# Altium PCB hh.PcbDoc
Units mm, origin at the board's own origin, x right, y up, seen from the top; angles counter-clockwise.
Board outline 82 x 82 mm, 4 copper layers (Top Layer, Internal Plane 1, Internal Plane 2, Bottom Layer); 28 components, 19 nets, 63 pads, 0 vias.
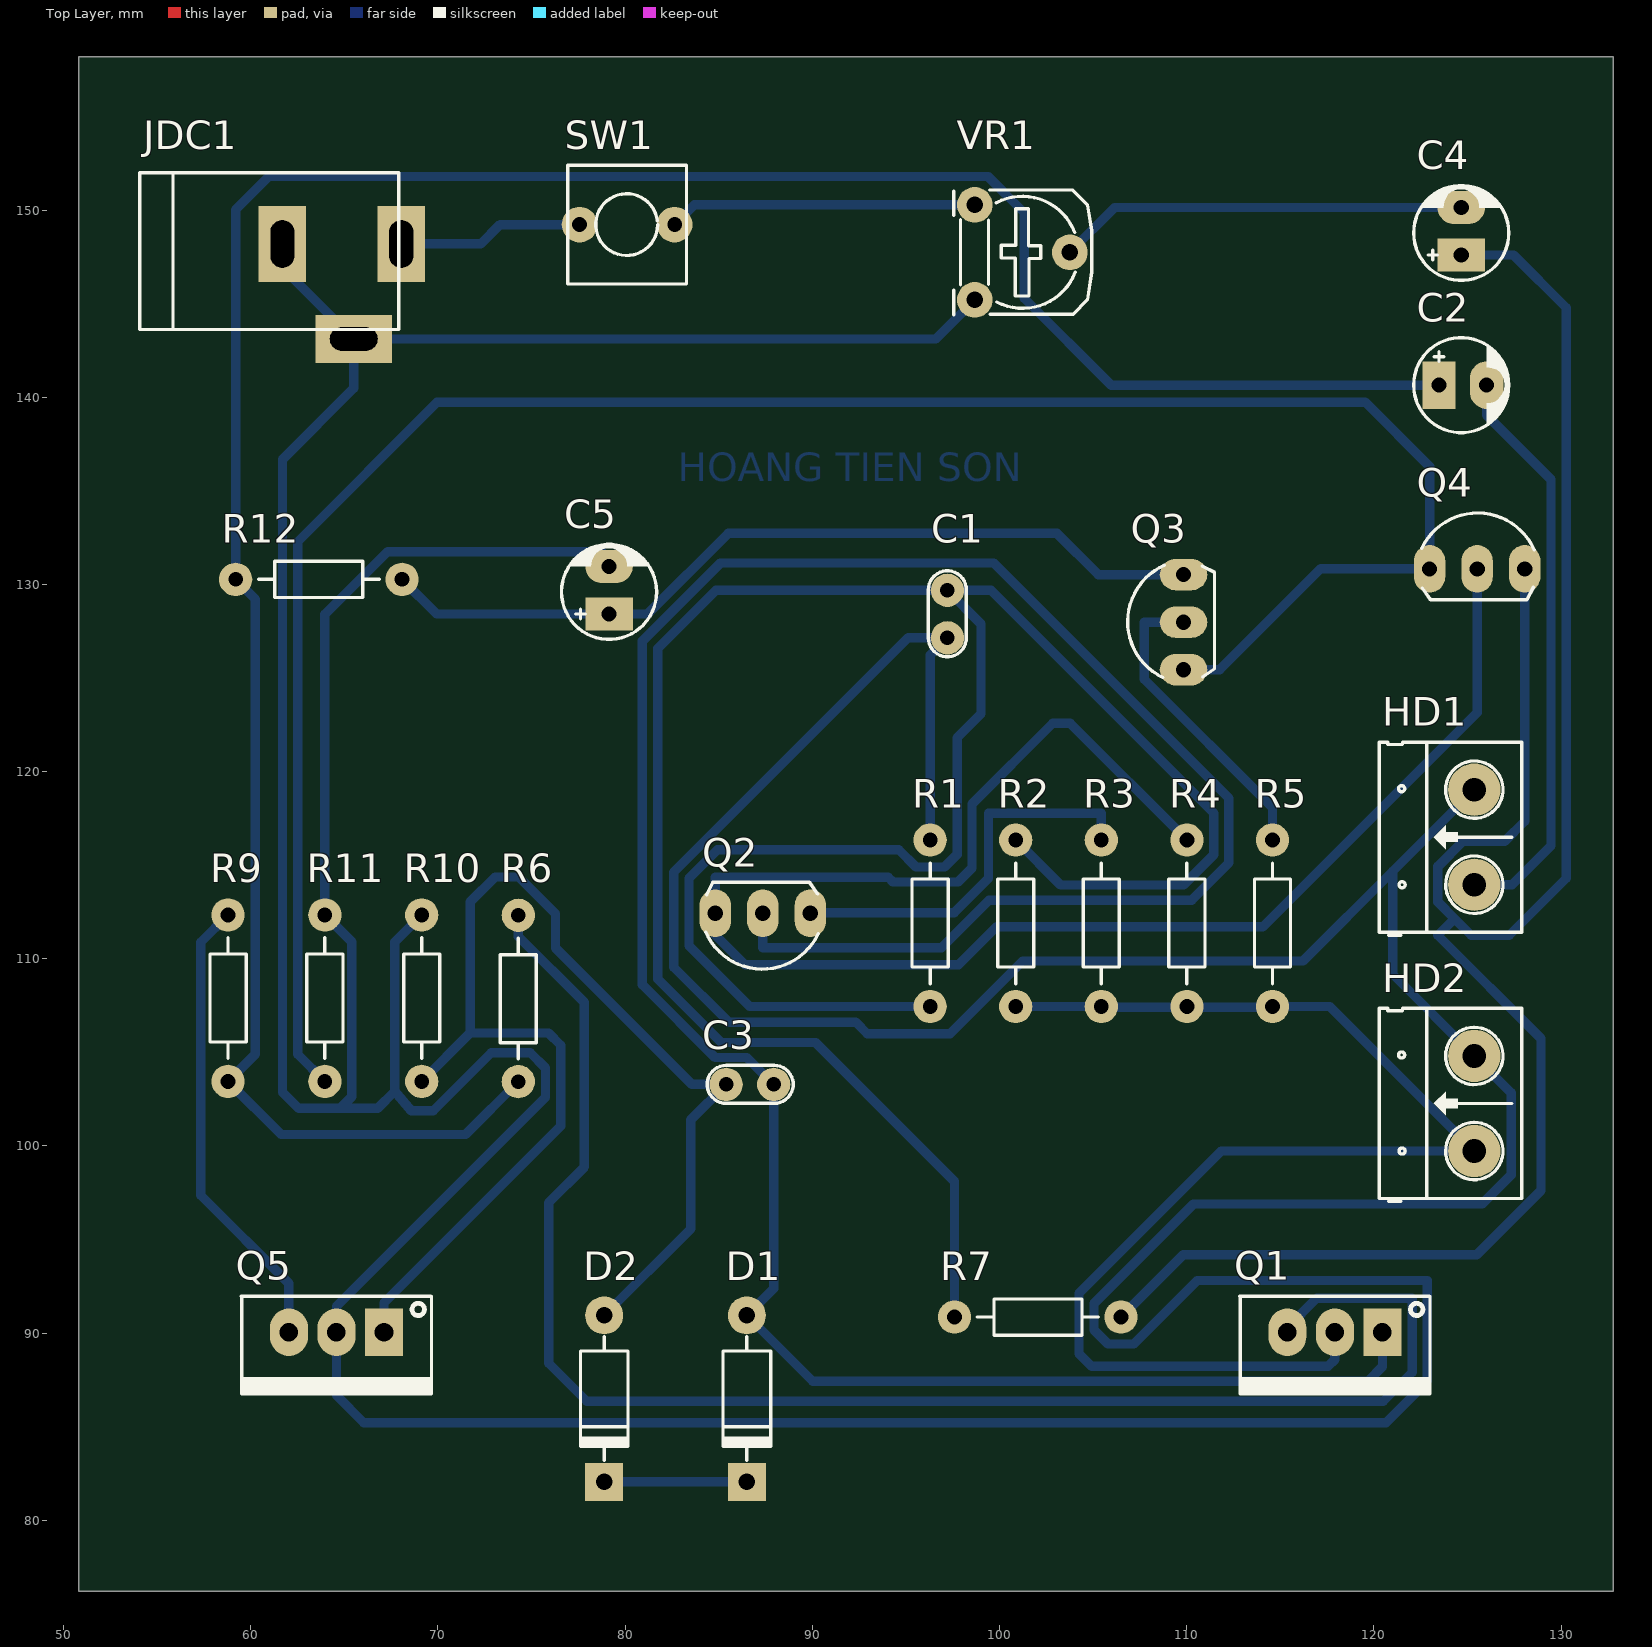
[diagram p0: Top Layer view]
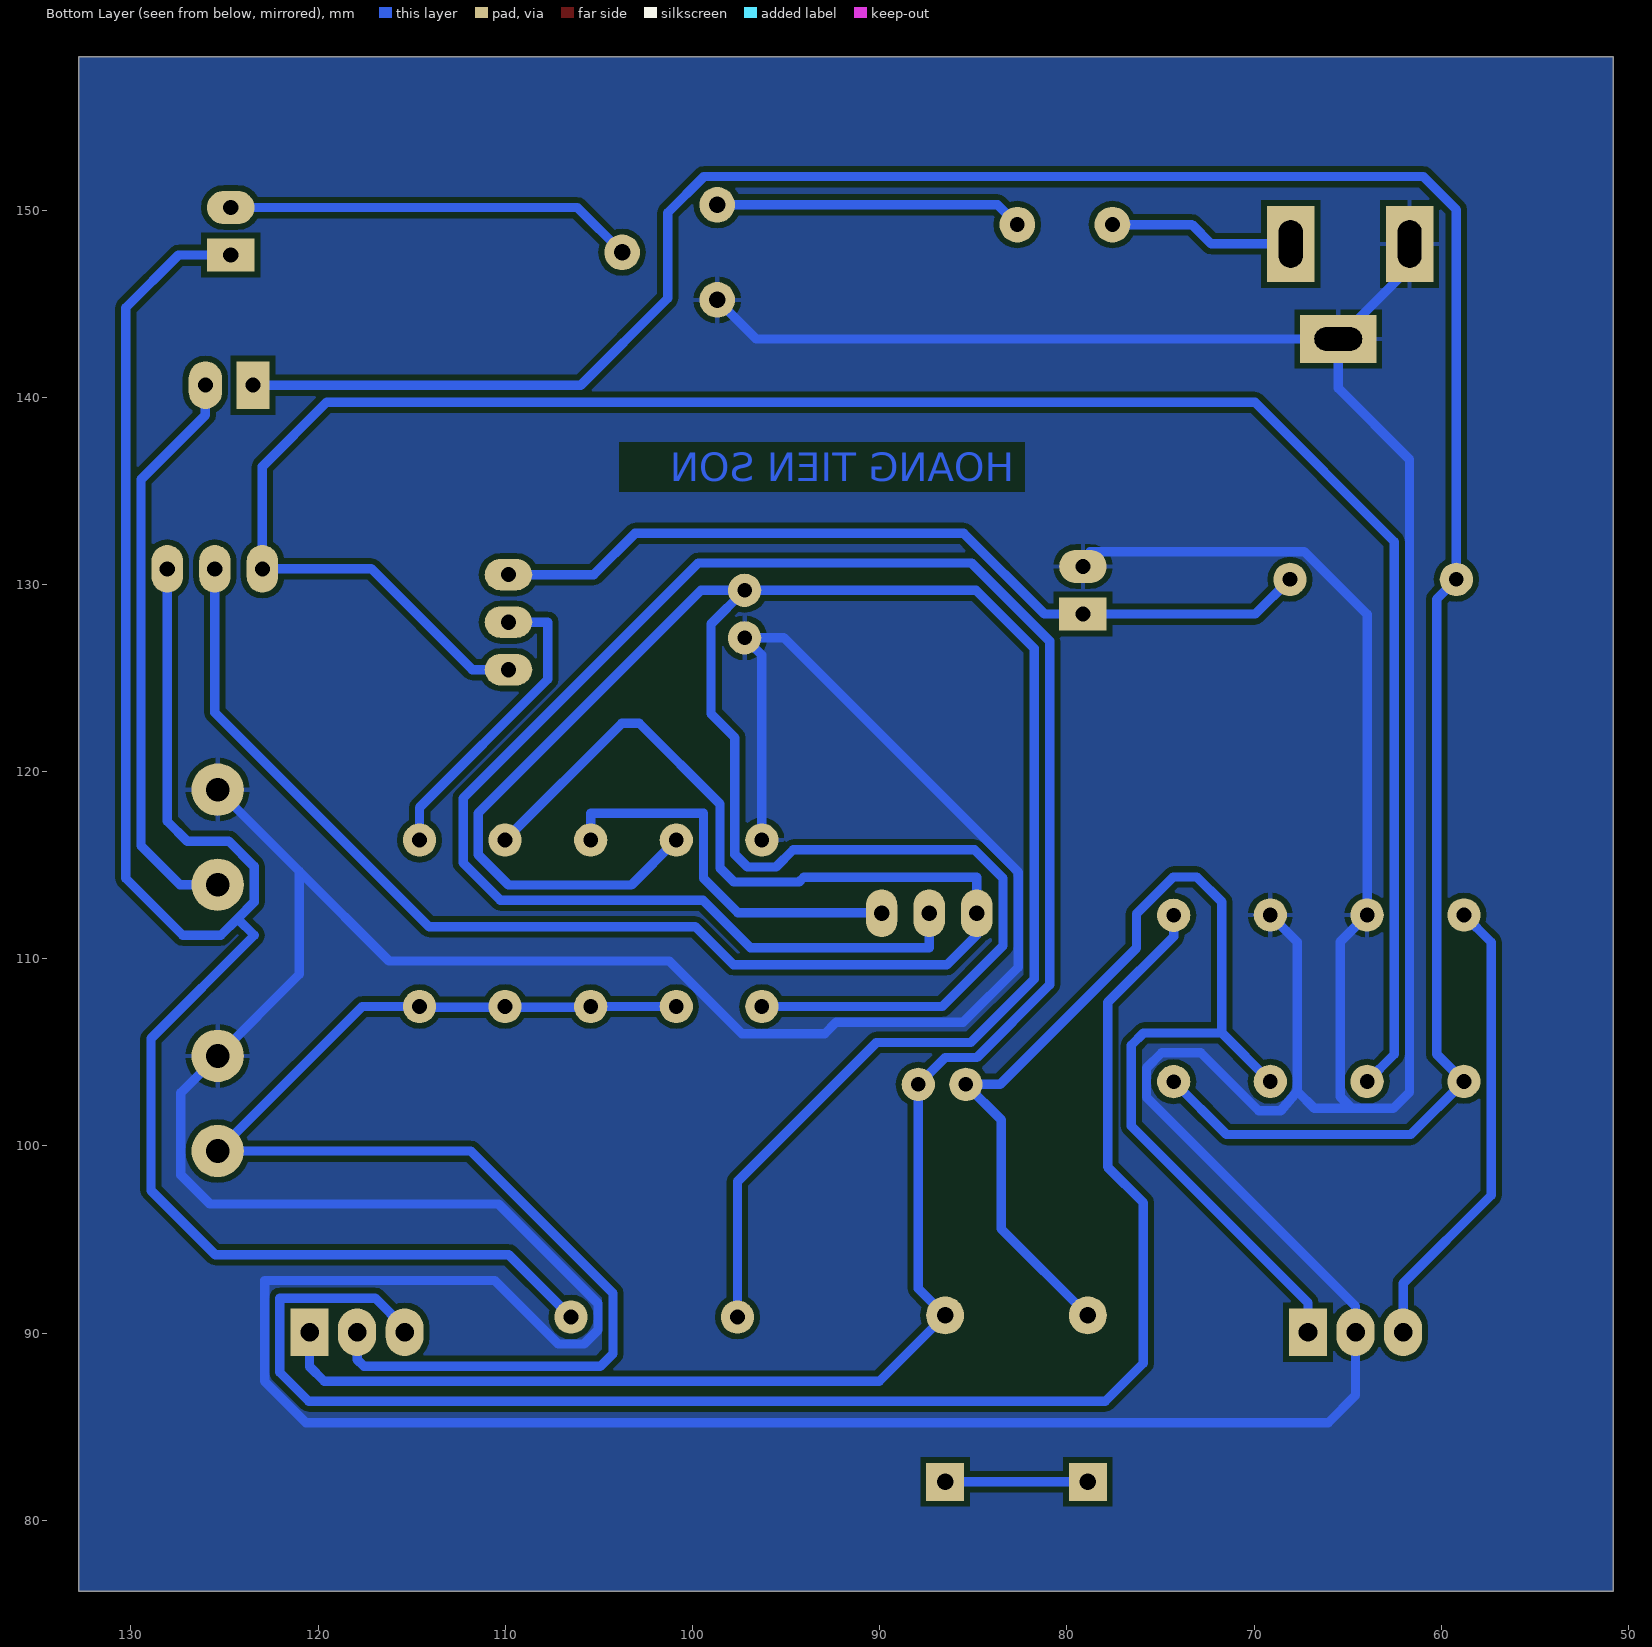
[diagram p1: Bottom Layer view, seen from below]
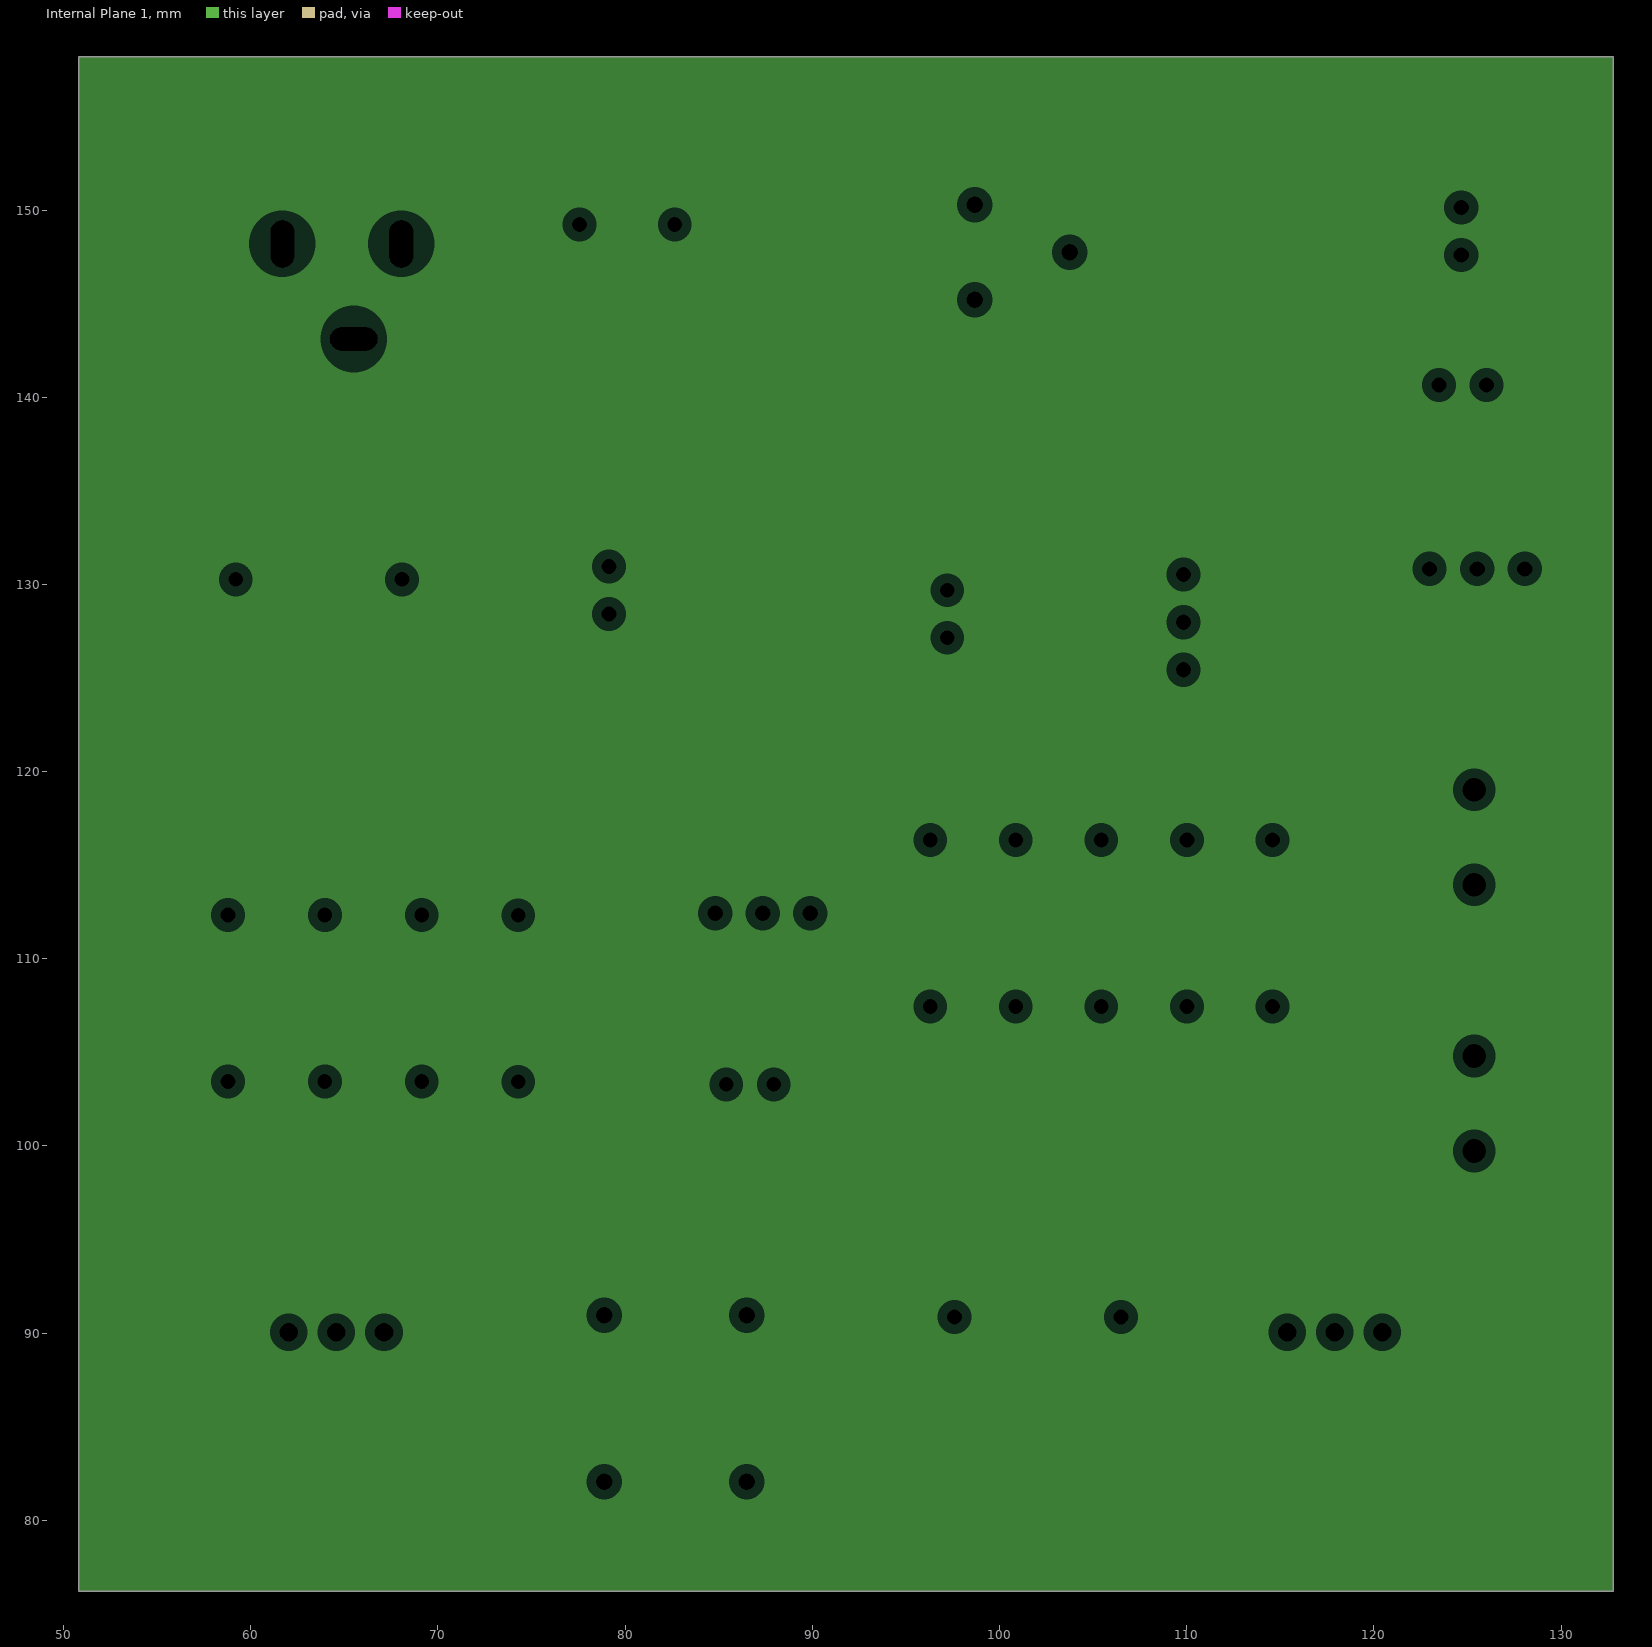
[diagram p2: Internal Plane 1, clearances drawn from the general rule]
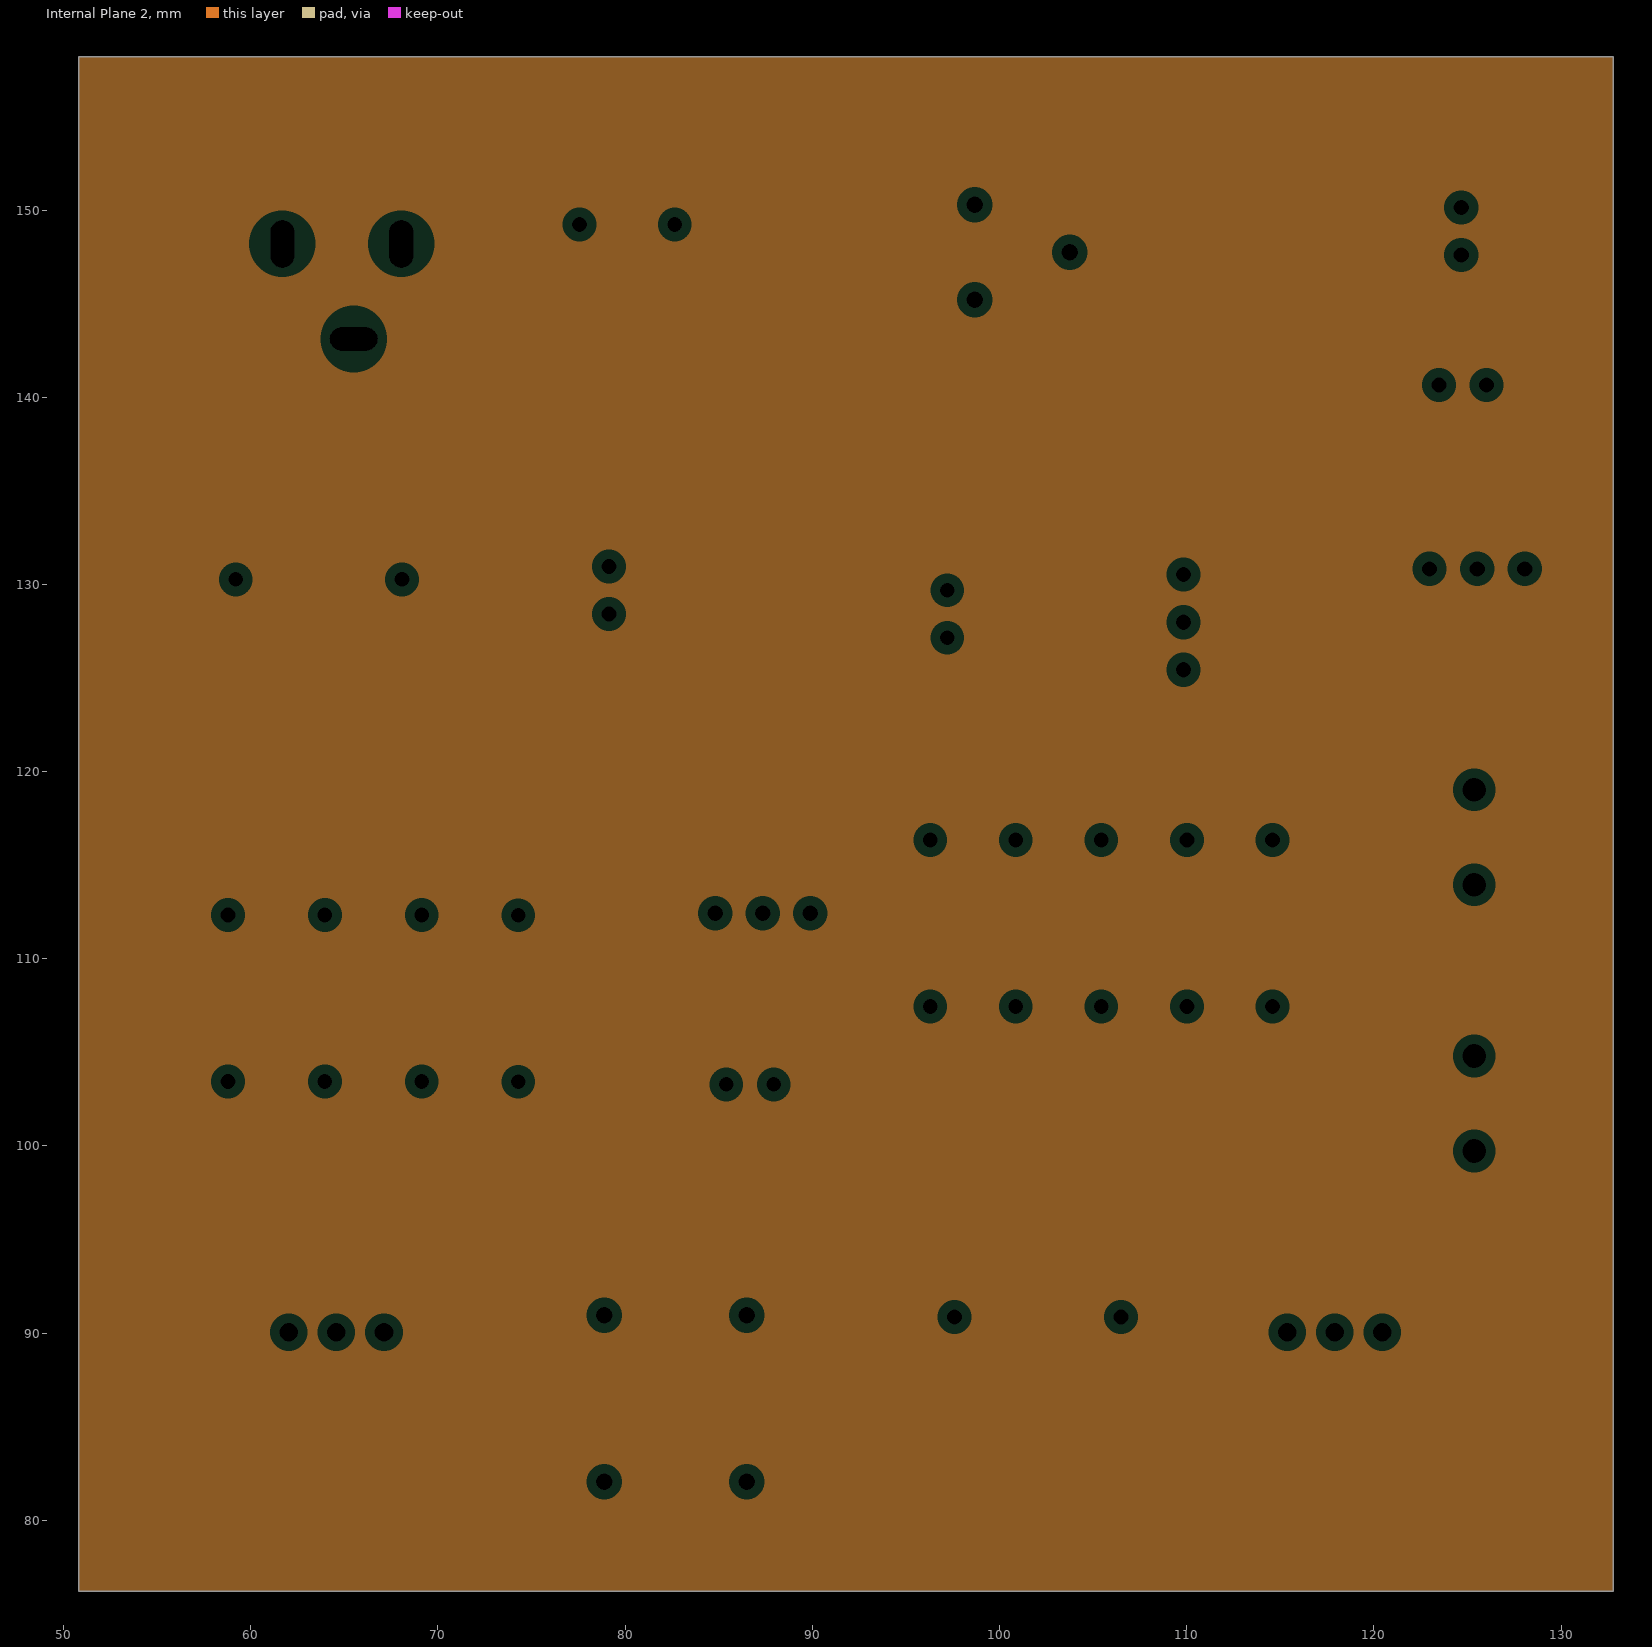
[diagram p3: Internal Plane 2, clearances drawn from the general rule]
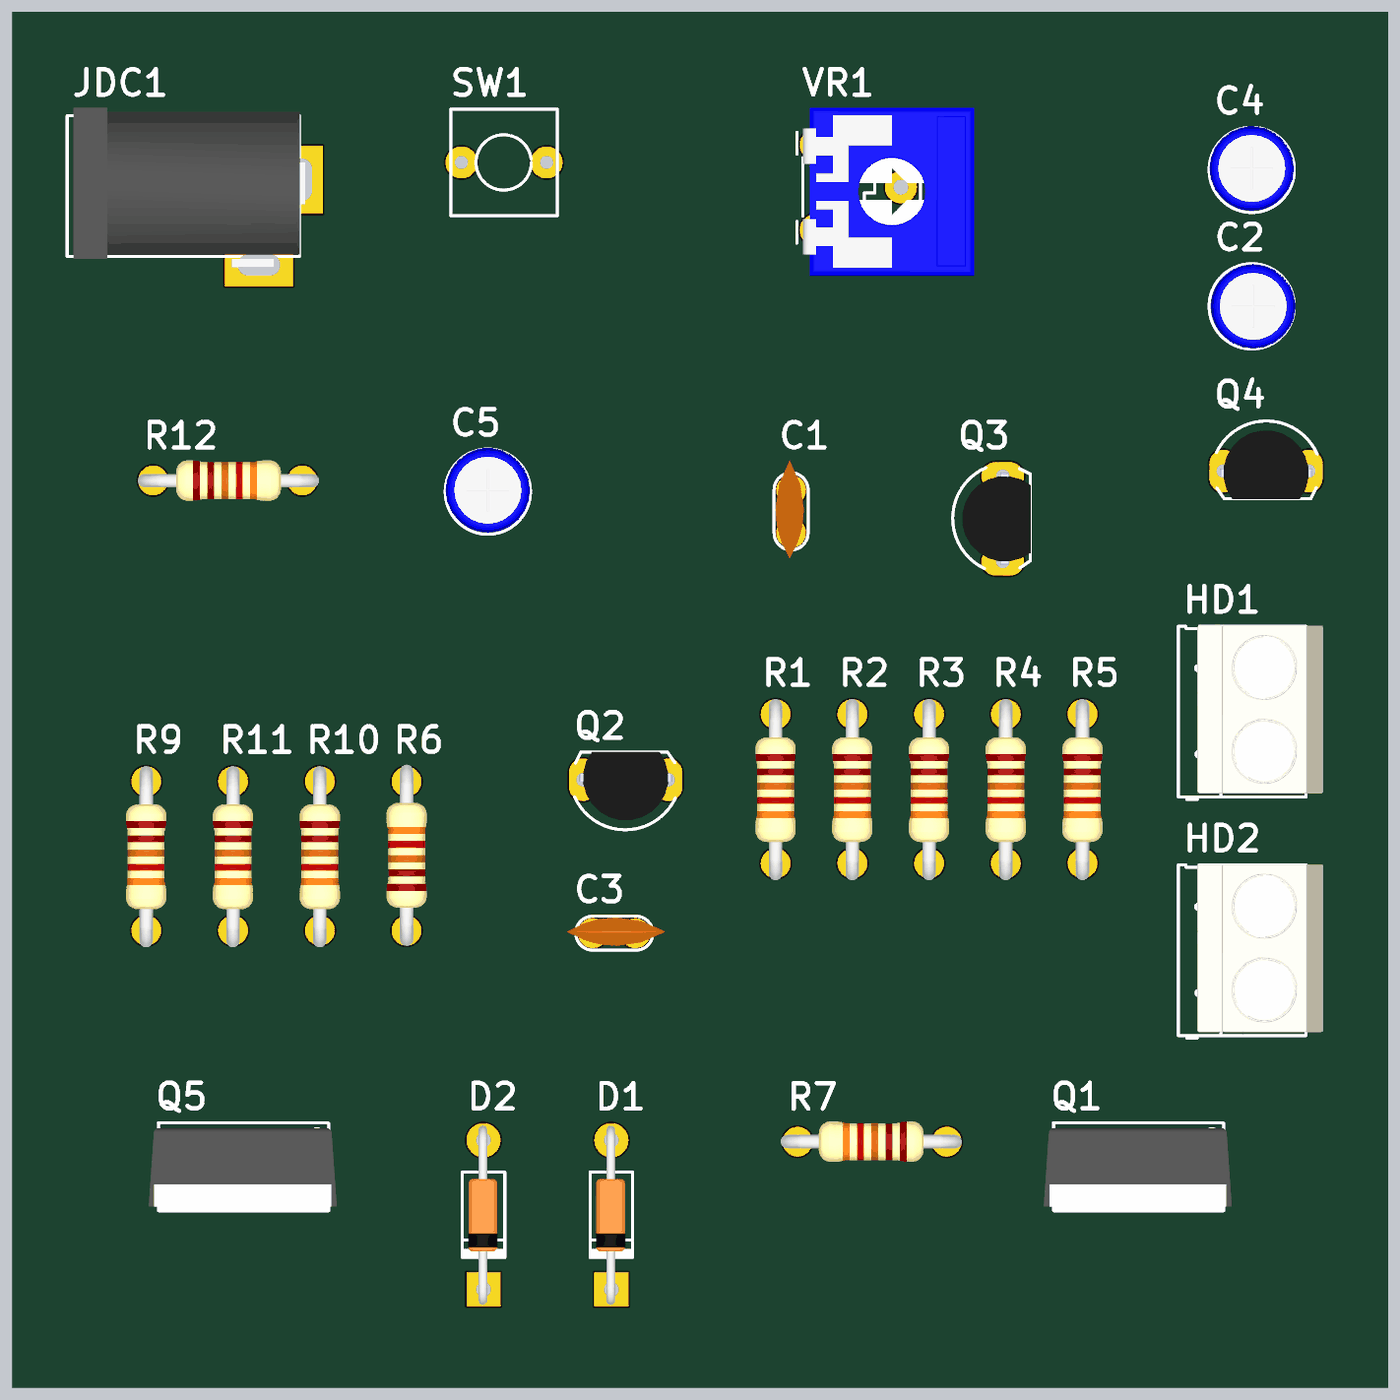
[diagram p4: 3D render of the assembled board from above, using the file's embedded part models]

## Layer stack, top to bottom
Top Layer: signal copper 0.0356
Dielectric: dielectric 0.32, FR-4, Dk 4.8
Internal Plane 1: plane copper 0.0356
Dielectric: dielectric 0.32, FR-4, Dk 4.8
Internal Plane 2: plane copper 0.0356
Dielectric: dielectric 0.32, FR-4, Dk 4.8
Bottom Layer: signal copper 0.0356

## Board outline
50.8,76.2 132.8,76.2 132.8,158.2 50.8,158.2

## Design rules (kind name [scope] priority, off if disabled: settings)
Clearance [All] p1: gap=0.3
PlaneClearance [All] p1: clearance=0.508
PlaneConnect [All] p1: planeconnectstyle=Relief reliefexpansion=0.508 reliefentries=4 reliefconductorwidth=0.254 reliefairgap=0.254
PolygonConnect [All] p1: connectstyle=Relief reliefconductorwidth=0.254 reliefentries=4 polygonreliefangle="90 Angle"
RoomDefinition nguyenly [InComponentClass('nguyenly')] p1: confinementstyle=ConfineIn formatcopy=TRUE lockcomponents=FALSE outline 0,0 50.8,0 50.8,25.4 0,25.4
RoutingLayers [All] p1: top layer_v5=FALSE bottom layer_v5=TRUE
RoutingVias [All] p1: holewidth=0.6 width=1 viastyle="Through Hole" minholewidth=0.711 minwidth=1.27 maxholewidth=0.711 maxwidth=1.27
SilkscreenOverComponentPads [All] p1: minsilkscreentomaskgap=0.254
SolderMaskExpansion [All] p1: expansion=0.102
Width GND [All] p1: maxlimit=0.5 minlimit=0.5 preferedwidth=0.5
Width NET [All] p2: maxlimit=0.5 minlimit=0.5 preferedwidth=0.5
24 further rules are at their usual default settings.

## Components (designator, comment, footprint, x,y, rotation, side; value= is the part's Value field where it differs from the comment)
C1 "100pF" CN1 97.215,127.146 r90 top
C2 "10uF" CP1/2 123.484,140.646 r0 top
C3 "100pF" CN1 85.398,103.29 r0 top
C4 "10uF" CP1/2 124.667,147.594 r90 top
C5 "10uF" CP1/2 79.142,128.418 r90 top
D1 "1N4007" D1A 86.503,90.95 r90 top
D2 "1N4007" D1A 78.883,90.95 r90 top
HD1 "Header 2" HED2 125.367,113.954 r90 top
HD2 "Header 2" HED2 125.367,99.73 r90 top
JDC1 "Jac DC" DC-IN 64.867,145.65 r0 top
Q1 "TIP41C" QTO-220 120.459,90.048 r180 top
Q2 "A1015" QTO-92 87.355,112.434 r180 top
Q3 "C1815" QTO-92 109.831,127.982 r90 top
Q4 "C1815" QTO-92 125.518,130.83 r0 top
Q5 "TIP42C" QTO-220 67.119,90.048 r180 top
R1 "Res1" R1/4W 96.295,107.45 r90 top
R2 "Res1" R1/4W 100.867,107.45 r90 top
R3 "Res1" R1/4W 105.439,107.45 r90 top
R4 "Res1" R1/4W 110.012,107.45 r90 top
R5 "Res1" R1/4W 114.584,107.45 r90 top
R6 "Res1" R1/4W 74.295,112.325 r270 top
R7 "Res1" R1/4W 97.599,90.861 r0 top
R9 "Res1" R1/4W 58.787,103.45 r90 top
R10 "Res1" R1/4W 69.134,103.45 r90 top
R11 "Res1" R1/4W 63.96,103.45 r90 top
R12 "Res1" R1/4W 68.083,130.268 r180 top
SW1 "SW" SW2 77.567,149.222 r0 top
VR1 "10K" VR 98.679,150.28 r270 top

## Footprints (in the part's own frame and the unit in brackets; to place one, negate y for a bottom-side part, rotate by r counter-clockwise, add the part's x,y. Pads: shape width x height; smd on the part's side, far side on the other; paste and mask are expansions set on the pad)
CN1 [mil]
  round 70 hole 31: 1(0,0) 2(100,0)
  silkscreen extent -40,-40 141,40, body extent -60,-30 170,37, height 265
CP1/2 [mil] "Tu hoa < 22uF/16>50V"
  rect 70x100 hole 32: 1(0,0)
  oval 70x100 hole 32: 2(100,0)
  silkscreen extent -53,-100 147,100, body extent -49,-99 149,99, height 287
D1A [mil] "Diode 1A, W 100mil, L 350mil"
  round 80 hole 35: 1(0,0)
  rect 80x80 hole 35: 2(-350,0)
  silkscreen extent -305,-50 -45,50, body extent -386,-33 34,36, height 84
DC-IN [mil] "Jac DC input"
  rect 100x160 hole 50 slot 100 at 90 deg: 1(125,100) 2(-125,100)
  rect 160x100 hole 50 slot 100 at 0 deg: 3(25,-100)
  silkscreen extent -425,-80 120,250, body extent -410,-105 134,269, height 434
HED2 [mil] "Header 2, 2 pin, hight 300mil, Pin to Pin 200, Colour Green"
  round 110 hole 50: 1(0,0) 2(200,0)
  silkscreen extent -106,-100 300,200, body extent -92,-140 302,155, height 394
QTO-92 [mil] "TO-92"
  oval 66x100 hole 32: 1(-100,0) 2(0,0) 3(100,0)
  silkscreen extent -117,-65 120,118, body extent -109,-66 109,95, height 245
QTO-220 [mil] "TO-220 - 1-2-3"
  rect 80x100 hole 39: 1(0,0)
  oval 80x100 hole 39: 2(100,0) 3(200,0)
  silkscreen extent -100,-76 300,130, body extent -119,-64 322,121, height 755
R1/4W [mil] "R 1/4W, 2 Pin, 350mil"
  round 70 hole 31: 1(0,0) 2(350,0)
  silkscreen extent 48,-38 302,38, body extent -40,-47 386,47, height 111
SW2 [mil] "SW button 2pin, 250x 250 mil"
  round 75 hole 31: 1(0,0) 2(200,0)
  silkscreen extent -25,-125 225,125
VR [mil] "Resistor Variable"
  round 75 hole 35: 1(0,0) 2(100,200) 3(200,0)
  silkscreen extent -31,-44 231,246, body extent -87,-30 307,372, height 165

## Part data
C1 C3: library part CN1, "Cap np  1pF - 472pF"
C2 C4 C5: library part CP1, "Cap P  0,1uF < 22uF , 16 - 50V"
D1 D2: library part D1A, "Diode 1A"
HD1 HD2: library part Hed2, "Header 2 (Green)"
JDC1: library part DCIN, "Jac DC input"
Q1: "NPN 2W, BCE"
Q2: "PNP 600mW, ECB"
Q3 Q4: "NPN 600mW, ECB"
Q5: "PNP 2W, BCE"
R1 R2 R3 R4 R5 R6 R7 R9 R10 R11 R12: library part Res1_1, "Resistor"
SW1: library part SW2, "Switch button 2 pin"
VR1: library part VR1, "Var Resistor"

## Nets (pads, with @x,y where several pads share a name; then routed paths per layer and width w, separated by ;. In a path a pad name is that pad's centre, name@x,y a point inside that pad or via, vN(x,y) a via of type N, cw(c..) or ccw(c..) an arc to the next point about the centre after c; other vN are vias at no path point)
GND: C1.1 C5.2 HD1.2 HD2.2 JDC1.2 JDC1.3 Q5.2 R1.2 R10.2 R11.2 VR1.3 | length 394.2
  Bottom Layer w0.5: JDC1.2 61.692,146.92 JDC1.3 ; R10.2 67.691,110.897 67.691,102.921 ; C5.2 78.765,130.958 78.765,131.75 67.31,131.75 63.96,128.4 R11.2 65.405,110.895 65.405,102.641 64.77,102.006 ; R1.2 96.295,126.226 C1.1 95.116,127.146 82.601,114.63 82.601,109.55 85.547,106.604 92.329,106.604 92.939,105.994 97.358,105.994 101.244,109.88 116.213,109.88 121.006,114.673 ; VR1.3 96.589,143.11 JDC1.3@65.507,143.11 ; HD1.2 121.006,114.673 ; 62.56,102.006 64.77,102.006 ; 62.56,102.006 61.697,102.87 61.697,136.677 65.507,140.487 JDC1.3@65.507,143.11 ; 62.56,102.006 64.77,102.006 ; 64.77,102.006 66.777,102.006 67.691,102.921 ; JDC1.3 JDC1.3@65.507,143.11 ; JDC1.3 JDC1.3@65.507,143.11 ; 67.691,102.921 68.58,101.879 69.748,101.879 72.847,104.978 74.93,104.978 75.743,104.165 75.743,102.604 64.579,91.44 Q5.2 64.579,86.678 66.04,85.217 120.65,85.217 122.86,87.427 122.86,92.812 110.566,92.812 107.177,89.422 105.798,89.422 105.05,90.17 105.05,91.588 110.363,96.901 125.781,96.901 127.33,98.45 127.33,102.847 HD2.2 121.006,109.171 121.006,114.673
NetC1_2: C1.2 R1.1 R2.2 R7.1 | length 144.5
  Bottom Layer w0.5: R1.1 86.657,107.45 83.414,110.693 83.414,114.3 84.938,115.824 94.615,115.824 95.538,114.901 97.065,114.901 97.734,115.57 97.734,121.813 99.009,123.088 99.009,127.892 C1.2 ; R7.1 97.599,98.107 90.177,105.529 85.138,105.529 81.746,108.92 81.746,126.577 84.855,129.686 C1.2 ; R2.2 103.263,113.944 109.829,113.944 111.455,115.57 111.455,117.78 99.549,129.686 C1.2
NetC2_1: C2.1 R6.2 R9.1 R12.2 | length 137.8
  Bottom Layer w0.5: R6.2 71.471,100.611 61.626,100.611 R9.1 60.249,104.912 60.249,129.212 R12.2 59.193,150.023 60.96,151.79 99.39,151.79 101.321,149.86 101.321,145.288 105.963,140.646 C2.1
NetC2_2: C2.2 HD1.1 | length 31
  Bottom Layer w0.5: HD1.1 127.381,113.954 129.464,116.037 129.464,135.611 126.024,139.051 C2.2
NetC3_1: C3.1 D2.1 Q5.1 R10.1 | length 69.9
  Bottom Layer w0.5: Q5.1 67.119,91.63 76.556,101.066 76.556,105.385 75.905,106.035 71.719,106.035 ; R10.1 71.719,106.035 ; D2.1 83.515,95.582 83.515,101.408 C3.1 83.571,103.29 76.284,110.577 76.284,112.403 74.316,114.372 73.061,114.372 71.719,113.03 71.719,106.035
NetC3_2: C3.2 D1.1 Q1.1 Q2.2 | length 148.4
  Bottom Layer w0.5: Q2.2 87.355,110.592 96.901,110.592 99.441,113.132 110.261,113.132 112.255,115.125 112.255,118.58 99.695,131.14 85.09,131.14 80.924,126.975 80.924,108.611 84.806,104.729 86.499,104.729 C3.2 87.938,92.385 D1.1 90.026,87.427 119.672,87.427 120.459,88.214 Q1.1
NetC4_1: C4.1 Q4.3 R7.2 | length 110.8
  Bottom Layer w0.5: R7.2 109.824,94.196 125.504,94.196 128.93,97.623 128.93,105.74 123.419,111.252 124.308,112.142 ; C4.1 127.457,147.594 130.277,144.775 130.277,114.3 127.229,111.252 125.198,111.252 124.308,112.142 ; Q4.3 128.058,117.345 127,116.287 124.772,116.287 123.42,114.935 123.42,113.03 ; 123.42,113.03 124.308,112.142 ; 123.42,113.03 124.308,112.142
NetC4_2: C4.2 VR1.2 | length 21.9
  Bottom Layer w0.5: VR1.2 106.153,150.134 C4.2
NetC5_1: C5.1 Q3.3 R12.1 | length 45.2
  Bottom Layer w0.5: R12.1 69.933,128.418 C5.1 81.197,128.418 85.504,132.725 103.069,132.725 105.271,130.522 Q3.3
NetD1_2: D1.2 D2.2 | length 7.6
  Bottom Layer w0.5: D2.2 D1.2
NetHD2_1: HD2.1 Q1.2 R2.1 R3.1 R4.1 R5.1 | length 70.8
  Bottom Layer w0.5: R2.1 R3.1 105.482,107.408 109.97,107.408 R4.1 110.054,107.408 114.542,107.408 R5.1 117.647,107.45 HD2.1 111.846,99.73 104.25,92.134 104.25,88.9 104.922,88.228 117.552,88.228 117.919,88.595 Q1.2
NetJDC1_1: JDC1.1 SW1.1 | length 10
  Bottom Layer w0.5: JDC1.1 72.288,148.19 73.32,149.222 SW1.1
NetQ1_3: Q1.3 R6.1 | length 85.3
  Bottom Layer w0.5: R6.1 74.295,111.193 77.825,107.662 77.825,98.882 75.917,96.974 75.917,88.396 77.952,86.361 120.498,86.361 122.047,87.909 122.047,91.868 116.942,91.868 115.379,90.306 Q1.3
NetQ2_1: Q2.1 R3.2 | length 21.3
  Bottom Layer w0.5: Q2.1 89.895,112.46 97.575,112.46 99.416,114.3 99.416,117.78 105.44,117.78 R3.2
NetQ2_3: Q2.3 Q4.2 R4.2 | length 91.1
  Bottom Layer w0.5: R4.2 103.772,122.58 102.848,122.58 98.534,118.266 98.534,114.845 97.79,114.101 94.306,114.101 94.056,114.351 84.815,114.351 Q2.3 84.815,111.273 86.411,109.677 97.813,109.677 99.845,111.709 114.071,111.709 125.518,123.156 Q4.2
NetQ3_1: Q3.1 Q4.1 R11.1 | length 115.3
  Bottom Layer w0.5: R11.1 62.509,104.901 62.509,132.283 69.952,139.725 119.549,139.725 122.978,136.296 Q4.1@122.978,130.835 ; Q3.1 111.76,125.442 117.153,130.835 Q4.1@122.978,130.835 ; Q4.1@122.978,130.835 Q4.1 Q4.1@122.978,130.835
NetQ3_2: Q3.2 R5.2 | length 16.6
  Bottom Layer w0.5: Q3.2 107.728,127.982 107.728,124.933 114.584,118.077 R5.2
NetQ5_3: Q5.3 R9.2 | length 24.8
  Bottom Layer w0.5: R9.2 57.328,110.881 57.328,97.37 62.039,92.659 Q5.3
NetSW1_2: SW1.2 VR1.1 | length 16.5
  Bottom Layer w0.5: SW1.2 83.705,150.28 VR1.1

## Polygon pours and split planes (outlines as drawn)
GND on Bottom Layer "Bottom" (solid, remove dead copper): 50.8,158.2 132.8,158.2 132.8,76.2 50.8,76.2 50.8,158.2
no net on Internal Plane 1 (split plane): 132.8,76.2 50.8,76.2 50.8,158.2 132.8,158.2
no net on Internal Plane 2 (split plane): 132.8,76.2 50.8,76.2 50.8,158.2 132.8,158.2

## Other copper
Bottom Layer:
  text "HOANG TIEN SON" at 82.804,135.509 h1.52